# EAGLE board SparkFun_USDA_Watershed_Monitor-Panel (EAGLE 9.6.2), part 1 of 5
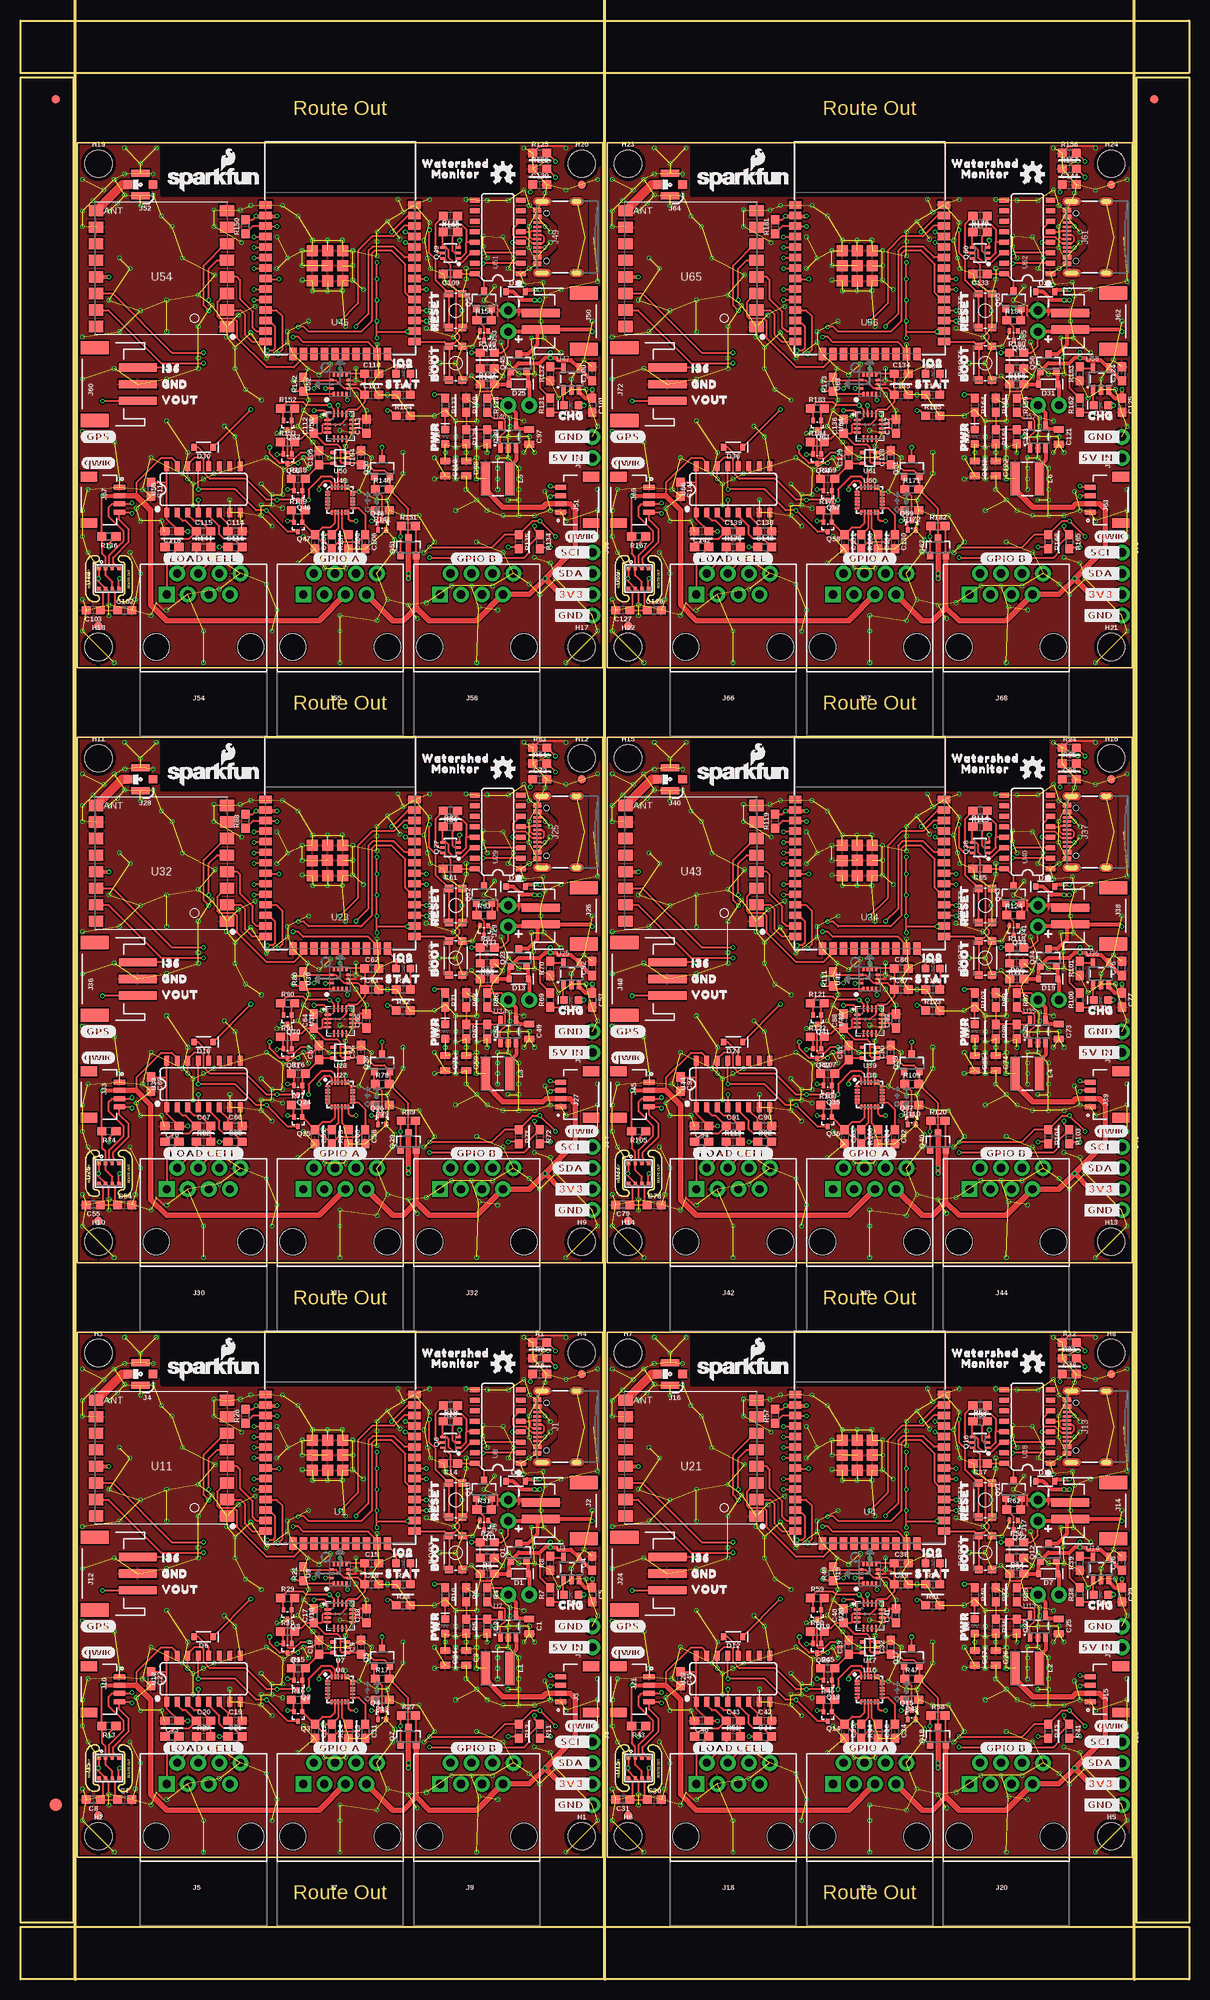
[diagram p0: board, top side]
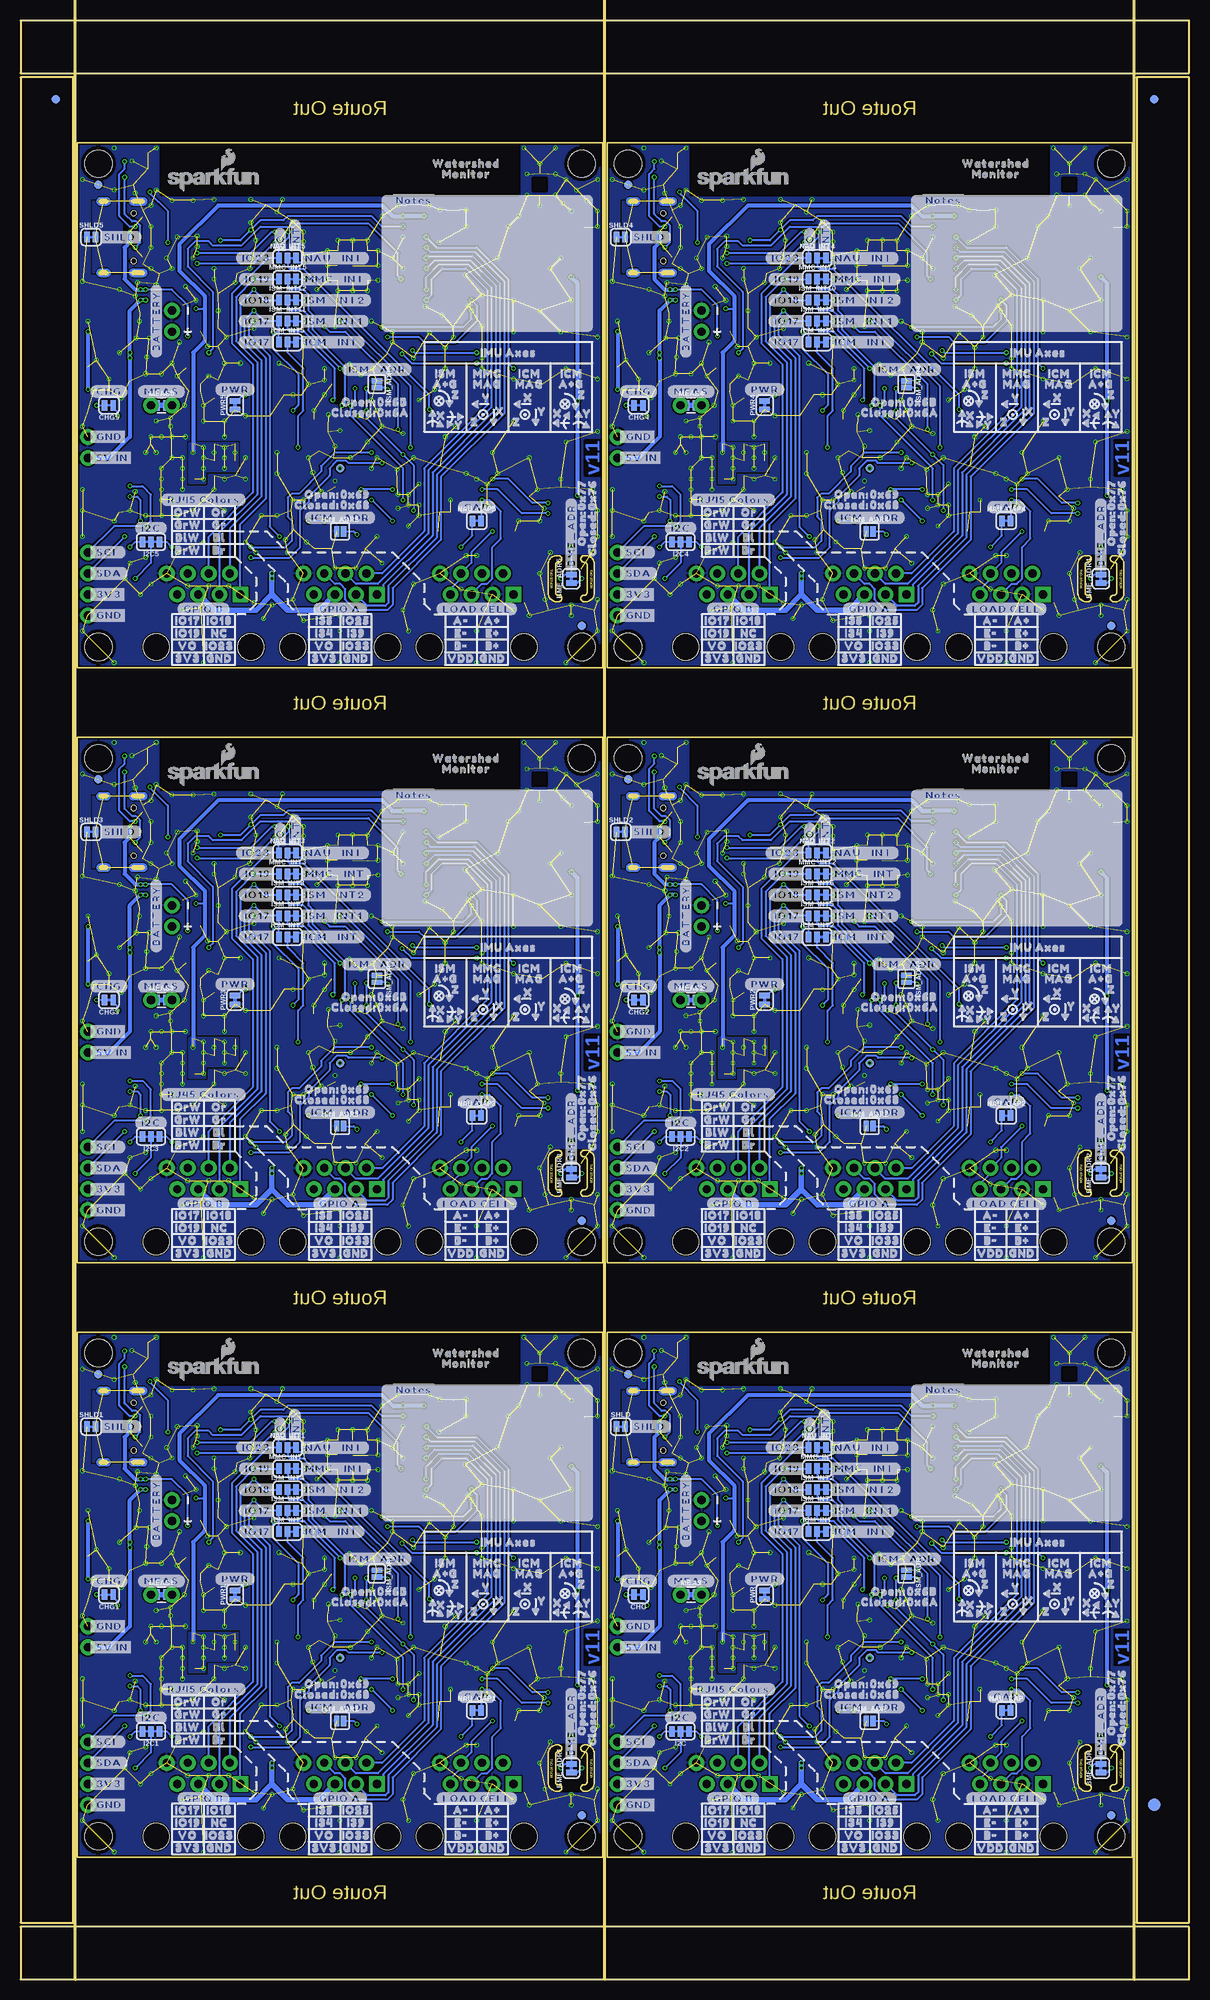
[diagram p1: board, bottom side, seen from below]

Size 141.22 x 236.73 mm. Coordinates in mm from the lower left corner, seen from the top.
Outline: 6.86,14.73 70.36,14.73 70.36,78.23 6.86,78.23 6.86,14.73
Outline: 70.87,14.73 134.37,14.73 134.37,78.23 70.87,78.23 70.87,14.73
Outline: 6.86,86.61 70.36,86.61 70.36,150.11 6.86,150.11 6.86,86.61
Outline: 70.87,86.61 134.37,86.61 134.37,150.11 70.87,150.11 70.87,86.61
Outline: 6.86,158.5 70.36,158.5 70.36,222 6.86,222 6.86,158.5
Outline: 70.87,158.5 134.37,158.5 134.37,222 70.87,222 70.87,158.5
Outline: 0,6.35 141.22,6.35 141.22,0 0,0 0,6.35
Outline: 134.87,229.87 141.22,229.87 141.22,6.86 134.87,6.86 134.87,229.87
Outline: 0,236.73 141.22,236.73 141.22,230.38 0,230.38 0,236.73
Outline: 0,229.87 6.35,229.87 6.35,6.86 0,6.86 0,229.87
Copper layers (1*16): Top 0.035mm / dielectric 1.5mm / Bottom 0.035mm
Design rules "SparkFun_USDA_Watershed_Monitor": minimum track width 5mil, minimum drill 0.3mm, track to track 5mil, track to pad 5mil, pad to pad 5mil, via to via 5mil, smd to smd 5mil, copper to edge 7mil, drill to drill 7mil, minimum pad ring 5mil, minimum via ring 5mil, stop-mask expansion 2.5mil, vias tented up to drill 25mil, thermal gap 10mil
tRestrict: area 17,71.9 to 60.2,78.2; area 18.2,33.9 to 18.4,34; area 19.4,33.9 to 19.7,34; area 20.7,33.8 to 21,33.9; area 22,33.9 to 22.2,34; area 23.2,33.9 to 23.5,34; area 54.9,66.7 to 55.4,66.9; area 54.9,65.4 to 55.4,65.7; area 54.9,64.1 to 55.4,64.4; area 60.5,67.9 to 61,68.2; area 81,71.9 to 124.2,78.2; area 82.2,33.9 to 82.4,34; 48 more areas
bRestrict: area 17,71.9 to 60.2,78.2; area 38.7,46.7 to 39.1,46.9; area 37.2,50.8 to 37.6,50.9; area 81,71.9 to 124.2,78.2; area 102.7,46.7 to 103.1,46.9; area 101.2,50.8 to 101.6,50.9; area 17,143.8 to 60.2,150.1; area 38.7,118.6 to 39.1,118.7; area 37.2,122.7 to 37.6,122.8; area 81,143.8 to 124.2,150.1; area 102.7,118.6 to 103.1,118.7; area 101.2,122.7 to 101.6,122.8; 6 more areas
Milling: 267 lines

## Footprints (pad centres in the part's own frame; a part is rotated, then mirrored left to right if it is on the bottom)
SMT-JUMPER_2_NC_TRACE_SILK = smd 0.66 x 1.27: 1 -0.521,0; 2 0.521,0
TACTILE_SWITCH_SMD_4.6X2.8MM = smd 0.9 x 1: 1 -2.05,-0.8; 2 2.05,-0.8; 3 2.05,0.8; 4 -2.05,0.8
0805 = smd 0.8 x 1.2: 1 -0.9,0; 2 0.9,0
0603 = smd 1.1 x 1: 1 -0.85,0; 2 0.85,0
SOD-323 = smd 0.63 x 0.83: A 1.15,0; C -1.15,0
LED-0603 = smd 1 x 1: A -0.877,0; C 0.877,0
FIDUCIAL-1X2 = smd 1 x 1: 1 0,0
FIDUCIAL-1.5X3 = smd 1.5 x 1.5: 1 0,0
STAND-OFF = hole 3.302: 0,0
SMT-JUMPER_3_2-NC_TRACE_SILK = smd 0.66 x 1.27: 1 -1.041,0; 2 0,0; 3 1.041,0
SMT-JUMPER_2_NO_SILK = smd 0.635 x 1.27: 1 -0.406,0; 2 0.406,0
SMT-JUMPER_3_1-NC_TRACE_SILK = smd 0.66 x 1.27: 1 -1.041,0; 2 0,0; 3 1.041,0
USB-C-16P-2LAYER-PADS = smd 0.3 x 1: A5 -1.25,-0.34; A6 -0.25,-0.34; A7 0.25,-0.34; A8 1.25,-0.34; B5 1.75,-0.34; B6 0.75,-0.34; B7 -0.75,-0.34; B8 -1.75,-0.34 | smd 0.6 x 1: GND -3.225,-0.34; GND2 3.225,-0.34; VBUS1 -2.45,-0.34; VBUS2 2.45,-0.34 | drill 0.4 pad 0.6 long: SHLD1 -4.318,-0.915; SHLD2 4.318,-0.915; SHLD3 -4.318,-5.095; SHLD4 4.318,-5.095 | hole 0.65: -2.89,-1.445; 2.89,-1.445
JST-2-SMD = smd 1 x 4.6: 1 -1,-3.7; 2 1,-3.7 | smd 1.6 x 3.4: NC1 -3.4,1.5; NC2 3.4,1.5
JST04_1MM_RA = smd 0.6 x 1.35: 1 -1.5,0; 2 -0.5,0; 3 0.5,0; 4 1.5,0 | smd 1.2 x 2: NC1 2.8,-3.675; NC2 -2.8,-3.675
U.FL = smd 2.2 x 0.85: 1 0,1.375; 2 0,-1.375 | smd 1.05 x 1: FEED 1.525,0; NC -1.525,0
RJ45-8 = drill 1 pad 1.88 square: 1 -4.445,6.35 | drill 1 pad 1.88: 2 -3.175,8.89; 3 -1.905,6.35; 4 -0.635,8.89; 5 0.635,6.35; 6 1.905,8.89; 7 3.175,6.35; 8 4.445,8.89 | hole 3.2: -5.715,0; 5.715,0
1X02_NO_SILK = drill 1.016 pad 1.88: 1 0,0; 2 2.54,0
1X04_NO_SILK = drill 1.016 pad 1.88: 1 0,0; 2 2.54,0; 3 5.08,0; 4 7.62,0
JST-3-SMD = smd 1 x 4.6: 1 2.01,-4.77; 2 0.01,-4.77; 3 -1.99,-4.77 | smd 1.6 x 3.4: NC1 -4.39,0.43; NC2 4.41,0.43
INDUCTOR_4X4MM = smd 4.089 x 1.143: P$1 0,1.473; P$2 0,-1.473
COMBO-JUMPER_2_NC_TRACE = smd 0.635 x 1.27: 1 -0.508,0; 2 0.508,0 | drill 1.016 pad 1.88: 3 -1.27,0; 4 1.27,0
SOT23-3 = smd 0.8 x 0.9: 1 -0.95,-1; 2 0.95,-1; 3 0,1.1
SOT-416FL = smd 0.46 x 0.65: 1 -0.5,-1.1; 2 0.5,-1.1; 3 0,0.05
SC70-6 = smd 0.3 x 0.66: 1 -0.65,-0.92; 2 0,-0.92; 3 0.65,-0.92; 4 0.65,0.92; 5 0,0.92; 6 -0.65,0.92
PAD.03X.04 = smd 1.016 x 1.016: 1 0,0
ESP-WROOM-32D = smd 0.9 x 1.5: 1 6.43,9; 2 5.16,9; 3 3.89,9; 4 2.62,9; 5 1.35,9; 6 0.08,9; 7 -1.19,9; 8 -2.46,9; 9 -3.73,9; 10 -5,9; 11 -6.27,9; 12 -7.54,9; 13 -8.81,9; 14 -10.08,9; 25 -10.08,-9; 26 -8.81,-9; 27 -7.54,-9; 28 -6.27,-9; 29 -5,-9; 30 -3.73,-9; 31 -2.46,-9; 32 -1.19,-9; 33 0.08,-9; 34 1.35,-9; 35 2.62,-9; 36 3.89,-9; 37 5.16,-9; 38 6.43,-9 | smd 1.5 x 0.9: 15 -11.57,5.715; 16 -11.57,4.445; 17 -11.57,3.175; 18 -11.57,1.905; 19 -11.57,0.635; 20 -11.57,-0.635; 21 -11.57,-1.905; 22 -11.57,-3.175; 23 -11.57,-4.445; 24 -11.57,-5.715 | smd 1.33 x 1.33: GND -0.912,1.531; GNDT1 -2.751,3.346; GNDT2 -2.761,1.516; GNDT3 -2.751,-0.314; GNDT4 -0.891,-0.324; GNDT5 0.909,-0.314; GNDT6 0.909,1.516; GNDT7 0.909,3.346; GNDT8 -0.921,3.346
SOT23-5 = smd 0.55 x 1.2: 1 -0.95,-1.3; 2 0,-1.3; 3 0.95,-1.3; 4 0.95,1.3; 5 -0.95,1.3
LGA3.0X3.0 = smd 0.4 x 0.4: 1 1.2,1.2; 2 1.2,0.4; 3 1.2,-0.4; 4 1.2,-1.2; 5 -1.2,-1.2; 6 -1.2,-0.4; 7 -1.2,0.4; 8 -1.2,1.2
QFN24-3X3-ICM-20948 = smd 0.495 x 0.25: 1 -1.552,1; 6 -1.552,-1; 13 1.552,-1; 18 1.552,1 | smd 0.6 x 0.25: 2 -1.5,0.6; 3 -1.5,0.2; 4 -1.5,-0.2; 5 -1.5,-0.6; 14 1.5,-0.6; 15 1.5,-0.2; 16 1.5,0.2; 17 1.5,0.6 | smd 0.25 x 0.495: 7 -1,-1.552; 12 1,-1.552; 19 1,1.552; 24 -1,1.552 | smd 0.25 x 0.6: 8 -0.6,-1.5; 9 -0.2,-1.5; 10 0.2,-1.5; 11 0.6,-1.5; 20 0.6,1.5; 21 0.2,1.5; 22 -0.2,1.5; 23 -0.6,1.5
SC70 = smd 0.4 x 0.75: 1 -0.65,-0.825; 2 0,-0.825; 3 0.65,-0.825; 4 0.65,0.825; 5 -0.65,0.825
SO016 = smd 0.6 x 1.2: 1 -4.445,-2.8; 2 -3.175,-2.8; 3 -1.905,-2.8; 4 -0.635,-2.8; 5 0.635,-2.8; 6 1.905,-2.8; 7 3.175,-2.8; 8 4.445,-2.8; 9 4.445,2.8; 10 3.175,2.8; 11 1.905,2.8; 12 0.635,2.8; 13 -0.635,2.8; 14 -1.905,2.8; 15 -3.175,2.8; 16 -4.445,2.8
LGA-14L = smd 0.48 x 0.3: P1 -1.163,0.75; P2 -1.163,0.25; P3 -1.163,-0.25; P4 -1.163,-0.75; P8 1.163,-0.75; P9 1.163,-0.25; P10 1.163,0.25; P11 1.163,0.75 | smd 0.3 x 0.48: P5 -0.5,-1; P6 0,-1; P7 0.5,-1; P12 0.5,1; P13 0,1; P14 -0.5,1
LGA-16-3X3MM-4X4PINS = smd 0.3 x 0.85: 1 0.754,1.498; 2 0.254,1.498; 3 -0.246,1.498; 4 -0.746,1.498; 9 -0.746,-1.506; 10 -0.246,-1.506; 11 0.254,-1.506; 12 0.754,-1.506 | smd 0.85 x 0.3: 5 -1.508,0.746; 6 -1.508,0.246; 7 -1.508,-0.254; 8 -1.508,-0.754; 13 1.496,-0.764; 14 1.496,-0.264; 15 1.496,0.236; 16 1.496,0.736
RFM95 = smd 1.75 x 1.35: 3.3V 7.9,1; !RESET -7.9,-3; ANT 7.9,-7; DIO0 7.9,3; DIO1 7.9,5; DIO2 7.9,7; DIO3 7.9,-3; DIO4 7.9,-1; DIO5 -7.9,-5; GND@1 -7.9,7; GND@2 -7.9,-7; GND@3 7.9,-5; NSS -7.9,-1; SCK -7.9,1; SDI -7.9,3; SDO -7.9,5
SO16 = smd 0.6 x 1.2: 1 -4.445,-2.8; 2 -3.175,-2.8; 3 -1.905,-2.8; 4 -0.635,-2.8; 5 0.635,-2.8; 6 1.905,-2.8; 7 3.175,-2.8; 8 4.445,-2.8; 9 4.445,2.8; 10 3.175,2.8; 11 1.905,2.8; 12 0.635,2.8; 13 -0.635,2.8; 14 -1.905,2.8; 15 -3.175,2.8; 16 -4.445,2.8

## Placement (x,y rotation side)
BME_ADR  JUMPER-SMT_2_NC_TRACE_SILK  [SMT-JUMPER_2_NC_TRACE_SILK]  10.67,25.53 90 bottom
BME_ADR1  JUMPER-SMT_2_NC_TRACE_SILK  [SMT-JUMPER_2_NC_TRACE_SILK]  74.68,25.53 90 bottom
BME_ADR2  JUMPER-SMT_2_NC_TRACE_SILK  [SMT-JUMPER_2_NC_TRACE_SILK]  10.67,97.41 90 bottom
BME_ADR3  JUMPER-SMT_2_NC_TRACE_SILK  [SMT-JUMPER_2_NC_TRACE_SILK]  74.68,97.41 90 bottom
BME_ADR4  JUMPER-SMT_2_NC_TRACE_SILK  [SMT-JUMPER_2_NC_TRACE_SILK]  10.67,169.29 90 bottom
BME_ADR5  JUMPER-SMT_2_NC_TRACE_SILK  [SMT-JUMPER_2_NC_TRACE_SILK]  74.68,169.29 90 bottom
BOOT  MOMENTARY-SWITCH-SPST-SMD-4.6X2.8MM  [TACTILE_SWITCH_SMD_4.6X2.8MM]  52.58,51.56 90 top
BOOT1  MOMENTARY-SWITCH-SPST-SMD-4.6X2.8MM  [TACTILE_SWITCH_SMD_4.6X2.8MM]  116.59,51.56 90 top
BOOT2  MOMENTARY-SWITCH-SPST-SMD-4.6X2.8MM  [TACTILE_SWITCH_SMD_4.6X2.8MM]  52.58,123.44 90 top
BOOT3  MOMENTARY-SWITCH-SPST-SMD-4.6X2.8MM  [TACTILE_SWITCH_SMD_4.6X2.8MM]  116.59,123.44 90 top
BOOT4  MOMENTARY-SWITCH-SPST-SMD-4.6X2.8MM  [TACTILE_SWITCH_SMD_4.6X2.8MM]  52.58,195.33 90 top
BOOT5  MOMENTARY-SWITCH-SPST-SMD-4.6X2.8MM  [TACTILE_SWITCH_SMD_4.6X2.8MM]  116.59,195.33 90 top
C1  22uF  [0805]  61.47,42.67 270 top
C2  22pF  [0603]  56.39,42.67 270 top
C3  22uF  [0805]  53.85,38.86 270 top
C4  4.7uF  [0603]  69.09,50.29 90 top
C5  4.7uF  [0603]  69.09,46.48 270 top
C6  10nF  [0603]  62.74,73.15 0 top
C7  0.1uF  [0603]  12.57,21.72 0 top
C8  0.1uF  [0603]  8.76,21.72 180 top
C9  1.0uF  [0603]  41.15,40.13 90 top
C10  1.0uF  [0603]  36.07,40.13 90 top
C11  0.1uF  [0603]  41.66,29.97 270 top
C12  0.1uF  [0603]  35.56,29.97 270 top
C13  0.1uF  [0603]  39.62,29.97 270 top
C14  0.1uF  [0603]  51.94,62.36 180 top
C15  DNP  [0603]  42.42,50.29 0 top
C16  DNP  [0603]  42.42,47.75 0 top
C17  DNP  [0603]  35.43,43.94 90 top
C18  DNP  [0603]  41.78,43.94 90 top
C19  0.1uF  [0603]  25.91,31.24 0 top
C20  0.1uF  [0603]  22.1,31.24 0 top
C21  330pF  [0603]  25.91,29.34 0 top
C22  0.1uF  [0603]  15.75,36.32 270 top
C23  10uF  [0603]  18.29,31.24 180 top
C24  22uF  [0805]  51.31,38.86 270 top
C25  22uF  [0805]  125.48,42.67 270 top
C26  22uF  [0805]  117.86,38.86 270 top
C27  22pF  [0603]  120.4,42.67 270 top
C28  4.7uF  [0603]  133.1,50.29 90 top
C29  4.7uF  [0603]  133.1,46.48 270 top
C30  0.1uF  [0603]  76.58,21.72 0 top
C31  0.1uF  [0603]  72.77,21.72 180 top
C32  1.0uF  [0603]  105.16,40.13 90 top
C33  1.0uF  [0603]  100.08,40.13 90 top
C34  0.1uF  [0603]  105.66,29.97 270 top
C35  0.1uF  [0603]  99.57,29.97 270 top
C36  0.1uF  [0603]  103.63,29.97 270 top
C37  0.1uF  [0603]  115.95,62.36 180 top
C38  DNP  [0603]  106.43,50.29 0 top
C39  DNP  [0603]  106.43,47.75 0 top
C40  DNP  [0603]  99.44,43.94 90 top
C41  DNP  [0603]  105.79,43.94 90 top
C42  0.1uF  [0603]  89.92,31.24 0 top
C43  0.1uF  [0603]  86.11,31.24 0 top
C44  330pF  [0603]  89.92,29.34 0 top
C45  0.1uF  [0603]  79.76,36.32 270 top
C46  10uF  [0603]  82.3,31.24 180 top
C47  22uF  [0805]  115.32,38.86 270 top
C48  10nF  [0603]  126.75,73.15 0 top
C49  22uF  [0805]  61.47,114.55 270 top
C50  22uF  [0805]  53.85,110.74 270 top
C51  22pF  [0603]  56.39,114.55 270 top
C52  4.7uF  [0603]  69.09,122.17 90 top
C53  4.7uF  [0603]  69.09,118.36 270 top
C54  0.1uF  [0603]  12.57,93.6 0 top
C55  0.1uF  [0603]  8.76,93.6 180 top
C56  1.0uF  [0603]  41.15,112.01 90 top
C57  1.0uF  [0603]  36.07,112.01 90 top
C58  0.1uF  [0603]  41.66,101.85 270 top
C59  0.1uF  [0603]  35.56,101.85 270 top
C60  0.1uF  [0603]  39.62,101.85 270 top
C61  0.1uF  [0603]  51.94,134.24 180 top
C62  DNP  [0603]  42.42,122.17 0 top
C63  DNP  [0603]  42.42,119.63 0 top
C64  DNP  [0603]  35.43,115.82 90 top
C65  DNP  [0603]  41.78,115.82 90 top
C66  0.1uF  [0603]  25.91,103.12 0 top
C67  0.1uF  [0603]  22.1,103.12 0 top
C68  330pF  [0603]  25.91,101.22 0 top
C69  0.1uF  [0603]  15.75,108.2 270 top
C70  10uF  [0603]  18.29,103.12 180 top
C71  22uF  [0805]  51.31,110.74 270 top
C72  10nF  [0603]  62.74,145.03 0 top
C73  22uF  [0805]  125.48,114.55 270 top
C74  22uF  [0805]  117.86,110.74 270 top
C75  22pF  [0603]  120.4,114.55 270 top
C76  4.7uF  [0603]  133.1,122.17 90 top
C77  4.7uF  [0603]  133.1,118.36 270 top
C78  0.1uF  [0603]  76.58,93.6 0 top
C79  0.1uF  [0603]  72.77,93.6 180 top
C80  1.0uF  [0603]  105.16,112.01 90 top
C81  1.0uF  [0603]  100.08,112.01 90 top
C82  0.1uF  [0603]  105.66,101.85 270 top
C83  0.1uF  [0603]  99.57,101.85 270 top
C84  0.1uF  [0603]  103.63,101.85 270 top
C85  0.1uF  [0603]  115.95,134.24 180 top
C86  DNP  [0603]  106.43,122.17 0 top
C87  DNP  [0603]  106.43,119.63 0 top
C88  DNP  [0603]  99.44,115.82 90 top
C89  DNP  [0603]  105.79,115.82 90 top
C90  0.1uF  [0603]  89.92,103.12 0 top
C91  0.1uF  [0603]  86.11,103.12 0 top
C92  330pF  [0603]  89.92,101.22 0 top
C93  0.1uF  [0603]  79.76,108.2 270 top
C94  10uF  [0603]  82.3,103.12 180 top
C95  22uF  [0805]  115.32,110.74 270 top
C96  10nF  [0603]  126.75,145.03 0 top
C97  22uF  [0805]  61.47,186.44 270 top
C98  22uF  [0805]  53.85,182.63 270 top
C99  22pF  [0603]  56.39,186.44 270 top
C100  4.7uF  [0603]  69.09,194.06 90 top
C101  4.7uF  [0603]  69.09,190.25 270 top
C102  0.1uF  [0603]  12.57,165.48 0 top
C103  0.1uF  [0603]  8.76,165.48 180 top
C104  1.0uF  [0603]  41.15,183.9 90 top
C105  1.0uF  [0603]  36.07,183.9 90 top
C106  0.1uF  [0603]  41.66,173.74 270 top
C107  0.1uF  [0603]  35.56,173.74 270 top
C108  0.1uF  [0603]  39.62,173.74 270 top
C109  0.1uF  [0603]  51.94,206.12 180 top
C110  DNP  [0603]  42.42,194.06 0 top
C111  DNP  [0603]  42.42,191.52 0 top
C112  DNP  [0603]  35.43,187.71 90 top
C113  DNP  [0603]  41.78,187.71 90 top
C114  0.1uF  [0603]  25.91,175.01 0 top
C115  0.1uF  [0603]  22.1,175.01 0 top
C116  330pF  [0603]  25.91,173.1 0 top
C117  0.1uF  [0603]  15.75,180.09 270 top
C118  10uF  [0603]  18.29,175.01 180 top
C119  22uF  [0805]  51.31,182.63 270 top
C120  10nF  [0603]  62.74,216.92 0 top
C121  22uF  [0805]  125.48,186.44 270 top
C122  22uF  [0805]  117.86,182.63 270 top
C123  22pF  [0603]  120.4,186.44 270 top
C124  4.7uF  [0603]  133.1,194.06 90 top
C125  4.7uF  [0603]  133.1,190.25 270 top
C126  0.1uF  [0603]  76.58,165.48 0 top
C127  0.1uF  [0603]  72.77,165.48 180 top
C128  1.0uF  [0603]  105.16,183.9 90 top
C129  1.0uF  [0603]  100.08,183.9 90 top
C130  0.1uF  [0603]  105.66,173.74 270 top
C131  0.1uF  [0603]  99.57,173.74 270 top
C132  0.1uF  [0603]  103.63,173.74 270 top
C133  0.1uF  [0603]  115.95,206.12 180 top
C134  DNP  [0603]  106.43,194.06 0 top
C135  DNP  [0603]  106.43,191.52 0 top
C136  DNP  [0603]  99.44,187.71 90 top
C137  DNP  [0603]  105.79,187.71 90 top
C138  0.1uF  [0603]  89.92,175.01 0 top
C139  0.1uF  [0603]  86.11,175.01 0 top
C140  330pF  [0603]  89.92,173.1 0 top
C141  0.1uF  [0603]  79.76,180.09 270 top
C142  10uF  [0603]  82.3,175.01 180 top
C143  22uF  [0805]  115.32,182.63 270 top
C144  10nF  [0603]  126.75,216.92 0 top
CHG  JUMPER-SMT_2_NC_TRACE_SILK  [SMT-JUMPER_2_NC_TRACE_SILK]  66.55,46.48 180 bottom
CHG1  JUMPER-SMT_2_NC_TRACE_SILK  [SMT-JUMPER_2_NC_TRACE_SILK]  130.56,46.48 180 bottom
CHG2  JUMPER-SMT_2_NC_TRACE_SILK  [SMT-JUMPER_2_NC_TRACE_SILK]  66.55,118.36 180 bottom
CHG3  JUMPER-SMT_2_NC_TRACE_SILK  [SMT-JUMPER_2_NC_TRACE_SILK]  130.56,118.36 180 bottom
CHG4  JUMPER-SMT_2_NC_TRACE_SILK  [SMT-JUMPER_2_NC_TRACE_SILK]  66.55,190.25 180 bottom
CHG5  JUMPER-SMT_2_NC_TRACE_SILK  [SMT-JUMPER_2_NC_TRACE_SILK]  130.56,190.25 180 bottom
D1  1A/23V/620mV  [SOD-323]  60.2,49.02 180 top
D2  DNP  [LED-0603]  51.31,42.67 90 top
D3  Yellow  [LED-0603]  66.55,46.48 180 top
D4  BLUE  [LED-0603]  46.23,50.29 0 top
D5  1A/23V/620mV  [SOD-323]  59.82,60.2 0 top
D6  1A/23V/620mV  [SOD-323]  22.1,41.4 180 top
D7  1A/23V/620mV  [SOD-323]  124.21,49.02 180 top
D8  DNP  [LED-0603]  115.32,42.67 90 top
D9  Yellow  [LED-0603]  130.56,46.48 180 top
D10  BLUE  [LED-0603]  110.24,50.29 0 top
D11  1A/23V/620mV  [SOD-323]  123.83,60.2 0 top
D12  1A/23V/620mV  [SOD-323]  86.11,41.4 180 top
D13  1A/23V/620mV  [SOD-323]  60.2,120.9 180 top
D14  DNP  [LED-0603]  51.31,114.55 90 top
D15  Yellow  [LED-0603]  66.55,118.36 180 top
D16  BLUE  [LED-0603]  46.23,122.17 0 top
D17  1A/23V/620mV  [SOD-323]  59.82,132.08 0 top
D18  1A/23V/620mV  [SOD-323]  22.1,113.28 180 top
D19  1A/23V/620mV  [SOD-323]  124.21,120.9 180 top
D20  DNP  [LED-0603]  115.32,114.55 90 top
D21  Yellow  [LED-0603]  130.56,118.36 180 top
D22  BLUE  [LED-0603]  110.24,122.17 0 top
D23  1A/23V/620mV  [SOD-323]  123.83,132.08 0 top
D24  1A/23V/620mV  [SOD-323]  86.11,113.28 180 top
D25  1A/23V/620mV  [SOD-323]  60.2,192.79 180 top
D26  DNP  [LED-0603]  51.31,186.44 90 top
D27  Yellow  [LED-0603]  66.55,190.25 180 top
D28  BLUE  [LED-0603]  46.23,194.06 0 top
D29  1A/23V/620mV  [SOD-323]  59.82,203.96 0 top
D30  1A/23V/620mV  [SOD-323]  22.1,185.17 180 top
D31  1A/23V/620mV  [SOD-323]  124.21,192.79 180 top
D32  DNP  [LED-0603]  115.32,186.44 90 top
D33  Yellow  [LED-0603]  130.56,190.25 180 top
D34  BLUE  [LED-0603]  110.24,194.06 0 top
D35  1A/23V/620mV  [SOD-323]  123.83,203.96 0 top
D36  1A/23V/620mV  [SOD-323]  86.11,185.17 180 top
E$1  [FIDUCIAL-1X2]  4.23,227.2 0 top
E$2  [FIDUCIAL-1X2]  4.23,227.2 0 bottom
E$3  [FIDUCIAL-1X2]  136.99,227.2 0 top
E$4  [FIDUCIAL-1X2]  136.99,227.2 0 bottom
E$5  [FIDUCIAL-1.5X3]  4.23,21.08 0 top
E$6  [FIDUCIAL-1.5X3]  4.23,21.08 0 bottom
FD1  FIDUCIAL1X2  [FIDUCIAL-1X2]  9.4,19.81 0 bottom
FD2  FIDUCIAL1X2  [FIDUCIAL-1X2]  9.4,19.81 0 top
FD3  FIDUCIAL1X2  [FIDUCIAL-1X2]  67.82,73.15 0 top
FD4  FIDUCIAL1X2  [FIDUCIAL-1X2]  67.82,73.15 0 bottom
FD5  FIDUCIAL1X2  [FIDUCIAL-1X2]  73.41,19.81 0 bottom
FD6  FIDUCIAL1X2  [FIDUCIAL-1X2]  73.41,19.81 0 top
FD7  FIDUCIAL1X2  [FIDUCIAL-1X2]  131.83,73.15 0 top
FD8  FIDUCIAL1X2  [FIDUCIAL-1X2]  131.83,73.15 0 bottom
FD9  FIDUCIAL1X2  [FIDUCIAL-1X2]  9.4,91.69 0 bottom
FD10  FIDUCIAL1X2  [FIDUCIAL-1X2]  9.4,91.69 0 top
FD11  FIDUCIAL1X2  [FIDUCIAL-1X2]  67.82,145.03 0 top
FD12  FIDUCIAL1X2  [FIDUCIAL-1X2]  67.82,145.03 0 bottom
FD13  FIDUCIAL1X2  [FIDUCIAL-1X2]  73.41,91.69 0 bottom
FD14  FIDUCIAL1X2  [FIDUCIAL-1X2]  73.41,91.69 0 top
FD15  FIDUCIAL1X2  [FIDUCIAL-1X2]  131.83,145.03 0 top
FD16  FIDUCIAL1X2  [FIDUCIAL-1X2]  131.83,145.03 0 bottom
FD17  FIDUCIAL1X2  [FIDUCIAL-1X2]  9.4,163.58 0 bottom
FD18  FIDUCIAL1X2  [FIDUCIAL-1X2]  9.4,163.58 0 top
FD19  FIDUCIAL1X2  [FIDUCIAL-1X2]  67.82,216.92 0 top
FD20  FIDUCIAL1X2  [FIDUCIAL-1X2]  67.82,216.92 0 bottom
FD21  FIDUCIAL1X2  [FIDUCIAL-1X2]  73.41,163.58 0 bottom
FD22  FIDUCIAL1X2  [FIDUCIAL-1X2]  73.41,163.58 0 top
FD23  FIDUCIAL1X2  [FIDUCIAL-1X2]  131.83,216.92 0 top
FD24  FIDUCIAL1X2  [FIDUCIAL-1X2]  131.83,216.92 0 bottom
H1  STAND-OFF  [STAND-OFF]  67.82,17.27 0 top
H2  STAND-OFF  [STAND-OFF]  9.4,17.27 0 top
H3  STAND-OFF  [STAND-OFF]  9.4,75.69 0 top
H4  STAND-OFF  [STAND-OFF]  67.82,75.69 0 top
H5  STAND-OFF  [STAND-OFF]  131.83,17.27 0 top
H6  STAND-OFF  [STAND-OFF]  73.41,17.27 0 top
H7  STAND-OFF  [STAND-OFF]  73.41,75.69 0 top
H8  STAND-OFF  [STAND-OFF]  131.83,75.69 0 top
H9  STAND-OFF  [STAND-OFF]  67.82,89.15 0 top
H10  STAND-OFF  [STAND-OFF]  9.4,89.15 0 top
H11  STAND-OFF  [STAND-OFF]  9.4,147.57 0 top
H12  STAND-OFF  [STAND-OFF]  67.82,147.57 0 top
H13  STAND-OFF  [STAND-OFF]  131.83,89.15 0 top
H14  STAND-OFF  [STAND-OFF]  73.41,89.15 0 top
H15  STAND-OFF  [STAND-OFF]  73.41,147.57 0 top
H16  STAND-OFF  [STAND-OFF]  131.83,147.57 0 top
H17  STAND-OFF  [STAND-OFF]  67.82,161.04 0 top
H18  STAND-OFF  [STAND-OFF]  9.4,161.04 0 top
H19  STAND-OFF  [STAND-OFF]  9.4,219.46 0 top
H20  STAND-OFF  [STAND-OFF]  67.82,219.46 0 top
H21  STAND-OFF  [STAND-OFF]  131.83,161.04 0 top
H22  STAND-OFF  [STAND-OFF]  73.41,161.04 0 top
H23  STAND-OFF  [STAND-OFF]  73.41,219.46 0 top
H24  STAND-OFF  [STAND-OFF]  131.83,219.46 0 top
I2C  JUMPER-SMT_3_2-NC_TRACE_SILK  [SMT-JUMPER_3_2-NC_TRACE_SILK]  61.47,29.97 180 bottom
I2C1  JUMPER-SMT_3_2-NC_TRACE_SILK  [SMT-JUMPER_3_2-NC_TRACE_SILK]  125.48,29.97 180 bottom
I2C2  JUMPER-SMT_3_2-NC_TRACE_SILK  [SMT-JUMPER_3_2-NC_TRACE_SILK]  61.47,101.85 180 bottom
I2C3  JUMPER-SMT_3_2-NC_TRACE_SILK  [SMT-JUMPER_3_2-NC_TRACE_SILK]  125.48,101.85 180 bottom
I2C4  JUMPER-SMT_3_2-NC_TRACE_SILK  [SMT-JUMPER_3_2-NC_TRACE_SILK]  61.47,173.74 180 bottom
I2C5  JUMPER-SMT_3_2-NC_TRACE_SILK  [SMT-JUMPER_3_2-NC_TRACE_SILK]  125.48,173.74 180 bottom
ICM_ADR  JUMPER-SMT_2_NO_SILK  [SMT-JUMPER_2_NO_SILK]  38.61,31.24 0 bottom
ICM_ADR1  JUMPER-SMT_2_NO_SILK  [SMT-JUMPER_2_NO_SILK]  102.62,31.24 0 bottom
ICM_ADR2  JUMPER-SMT_2_NO_SILK  [SMT-JUMPER_2_NO_SILK]  38.61,103.12 0 bottom
ICM_ADR3  JUMPER-SMT_2_NO_SILK  [SMT-JUMPER_2_NO_SILK]  102.62,103.12 0 bottom
ICM_ADR4  JUMPER-SMT_2_NO_SILK  [SMT-JUMPER_2_NO_SILK]  38.61,175.01 0 bottom
ICM_ADR5  JUMPER-SMT_2_NO_SILK  [SMT-JUMPER_2_NO_SILK]  102.62,175.01 0 bottom
ICM_INT  JUMPER-SMT_3_1-NC_TRACE_SILK  [SMT-JUMPER_3_1-NC_TRACE_SILK]  44.96,54.1 0 bottom
ICM_INT1  JUMPER-SMT_3_1-NC_TRACE_SILK  [SMT-JUMPER_3_1-NC_TRACE_SILK]  108.97,54.1 0 bottom
ICM_INT2  JUMPER-SMT_3_1-NC_TRACE_SILK  [SMT-JUMPER_3_1-NC_TRACE_SILK]  44.96,125.98 0 bottom
ICM_INT3  JUMPER-SMT_3_1-NC_TRACE_SILK  [SMT-JUMPER_3_1-NC_TRACE_SILK]  108.97,125.98 0 bottom
ICM_INT4  JUMPER-SMT_3_1-NC_TRACE_SILK  [SMT-JUMPER_3_1-NC_TRACE_SILK]  44.96,197.87 0 bottom
ICM_INT5  JUMPER-SMT_3_1-NC_TRACE_SILK  [SMT-JUMPER_3_1-NC_TRACE_SILK]  108.97,197.87 0 bottom
ISM_ADR  JUMPER-SMT_2_NO_SILK  [SMT-JUMPER_2_NO_SILK]  34.16,49.02 270 bottom
ISM_ADR1  JUMPER-SMT_2_NO_SILK  [SMT-JUMPER_2_NO_SILK]  98.17,49.02 270 bottom
ISM_ADR2  JUMPER-SMT_2_NO_SILK  [SMT-JUMPER_2_NO_SILK]  34.16,120.9 270 bottom
ISM_ADR3  JUMPER-SMT_2_NO_SILK  [SMT-JUMPER_2_NO_SILK]  98.17,120.9 270 bottom
ISM_ADR4  JUMPER-SMT_2_NO_SILK  [SMT-JUMPER_2_NO_SILK]  34.16,192.79 270 bottom
ISM_ADR5  JUMPER-SMT_2_NO_SILK  [SMT-JUMPER_2_NO_SILK]  98.17,192.79 270 bottom
ISM_INT1  JUMPER-SMT_3_1-NC_TRACE_SILK  [SMT-JUMPER_3_1-NC_TRACE_SILK]  44.96,56.64 0 bottom
ISM_INT2  JUMPER-SMT_3_1-NC_TRACE_SILK  [SMT-JUMPER_3_1-NC_TRACE_SILK]  44.96,59.18 0 bottom
ISM_INT3  JUMPER-SMT_3_1-NC_TRACE_SILK  [SMT-JUMPER_3_1-NC_TRACE_SILK]  108.97,56.64 0 bottom
ISM_INT4  JUMPER-SMT_3_1-NC_TRACE_SILK  [SMT-JUMPER_3_1-NC_TRACE_SILK]  108.97,59.18 0 bottom
ISM_INT5  JUMPER-SMT_3_1-NC_TRACE_SILK  [SMT-JUMPER_3_1-NC_TRACE_SILK]  44.96,128.52 0 bottom
ISM_INT6  JUMPER-SMT_3_1-NC_TRACE_SILK  [SMT-JUMPER_3_1-NC_TRACE_SILK]  44.96,131.06 0 bottom
ISM_INT7  JUMPER-SMT_3_1-NC_TRACE_SILK  [SMT-JUMPER_3_1-NC_TRACE_SILK]  108.97,128.52 0 bottom
ISM_INT8  JUMPER-SMT_3_1-NC_TRACE_SILK  [SMT-JUMPER_3_1-NC_TRACE_SILK]  108.97,131.06 0 bottom
ISM_INT9  JUMPER-SMT_3_1-NC_TRACE_SILK  [SMT-JUMPER_3_1-NC_TRACE_SILK]  44.96,200.41 0 bottom
ISM_INT10  JUMPER-SMT_3_1-NC_TRACE_SILK  [SMT-JUMPER_3_1-NC_TRACE_SILK]  44.96,202.95 0 bottom
ISM_INT11  JUMPER-SMT_3_1-NC_TRACE_SILK  [SMT-JUMPER_3_1-NC_TRACE_SILK]  108.97,200.41 0 bottom
ISM_INT12  JUMPER-SMT_3_1-NC_TRACE_SILK  [SMT-JUMPER_3_1-NC_TRACE_SILK]  108.97,202.95 0 bottom
J1  [USB-C-16P-2LAYER-PADS]  62.1,66.8 90 top
J2  [JST-2-SMD]  66.55,56.64 270 top
J3  QWIIC_RIGHT_ANGLE  [JST04_1MM_RA]  65.28,35.05 90 top
J4  U.FL  [U.FL]  14.48,73.15 180 top
J5  RJ45  [RJ45-8]  22.1,17.27 0 top
J6  [1X02_NO_SILK]  58.93,55.37 90 top
J7  RJ45  [RJ45-8]  38.61,17.27 0 top
J8  [1X04_NO_SILK]  69.09,28.7 270 top
J9  RJ45  [RJ45-8]  55.12,17.27 0 top
J10  QWIIC_RIGHT_ANGLE  [JST04_1MM_RA]  11.94,35.05 270 top
J11  [1X02_NO_SILK]  69.09,40.13 90 top
J12  3-PIN SMD  [JST-3-SMD]  9.4,49.02 90 top
J13  [USB-C-16P-2LAYER-PADS]  126.11,66.8 90 top
J14  [JST-2-SMD]  130.56,56.64 270 top
J15  QWIIC_RIGHT_ANGLE  [JST04_1MM_RA]  129.29,35.05 90 top
J16  U.FL  [U.FL]  78.49,73.15 180 top
J17  [1X02_NO_SILK]  122.94,55.37 90 top
J18  RJ45  [RJ45-8]  86.11,17.27 0 top
J19  RJ45  [RJ45-8]  102.62,17.27 0 top
J20  RJ45  [RJ45-8]  119.13,17.27 0 top
J21  QWIIC_RIGHT_ANGLE  [JST04_1MM_RA]  75.95,35.05 270 top
J22  [1X04_NO_SILK]  133.1,28.7 270 top
J23  [1X02_NO_SILK]  133.1,40.13 90 top
J24  3-PIN SMD  [JST-3-SMD]  73.41,49.02 90 top
J25  [USB-C-16P-2LAYER-PADS]  62.1,138.68 90 top
J26  [JST-2-SMD]  66.55,128.52 270 top
J27  QWIIC_RIGHT_ANGLE  [JST04_1MM_RA]  65.28,106.93 90 top
J28  U.FL  [U.FL]  14.48,145.03 180 top
J29  [1X02_NO_SILK]  58.93,127.25 90 top
J30  RJ45  [RJ45-8]  22.1,89.15 0 top
J31  RJ45  [RJ45-8]  38.61,89.15 0 top
J32  RJ45  [RJ45-8]  55.12,89.15 0 top
J33  QWIIC_RIGHT_ANGLE  [JST04_1MM_RA]  11.94,106.93 270 top
J34  [1X04_NO_SILK]  69.09,100.58 270 top
J35  [1X02_NO_SILK]  69.09,112.01 90 top
J36  3-PIN SMD  [JST-3-SMD]  9.4,120.9 90 top
J37  [USB-C-16P-2LAYER-PADS]  126.11,138.68 90 top
J38  [JST-2-SMD]  130.56,128.52 270 top
J39  QWIIC_RIGHT_ANGLE  [JST04_1MM_RA]  129.29,106.93 90 top
J40  U.FL  [U.FL]  78.49,145.03 180 top
J41  [1X02_NO_SILK]  122.94,127.25 90 top
J42  RJ45  [RJ45-8]  86.11,89.15 0 top
J43  RJ45  [RJ45-8]  102.62,89.15 0 top
J44  RJ45  [RJ45-8]  119.13,89.15 0 top
J45  QWIIC_RIGHT_ANGLE  [JST04_1MM_RA]  75.95,106.93 270 top
J46  [1X04_NO_SILK]  133.1,100.58 270 top
J47  [1X02_NO_SILK]  133.1,112.01 90 top
J48  3-PIN SMD  [JST-3-SMD]  73.41,120.9 90 top
J49  [USB-C-16P-2LAYER-PADS]  62.1,210.57 90 top
J50  [JST-2-SMD]  66.55,200.41 270 top
J51  QWIIC_RIGHT_ANGLE  [JST04_1MM_RA]  65.28,178.82 90 top
J52  U.FL  [U.FL]  14.48,216.92 180 top
J53  [1X02_NO_SILK]  58.93,199.14 90 top
J54  RJ45  [RJ45-8]  22.1,161.04 0 top
J55  RJ45  [RJ45-8]  38.61,161.04 0 top
J56  RJ45  [RJ45-8]  55.12,161.04 0 top
J57  QWIIC_RIGHT_ANGLE  [JST04_1MM_RA]  11.94,178.82 270 top
J58  [1X04_NO_SILK]  69.09,172.47 270 top
J59  [1X02_NO_SILK]  69.09,183.9 90 top
J60  3-PIN SMD  [JST-3-SMD]  9.4,192.79 90 top
J61  [USB-C-16P-2LAYER-PADS]  126.11,210.57 90 top
J62  [JST-2-SMD]  130.56,200.41 270 top
J63  QWIIC_RIGHT_ANGLE  [JST04_1MM_RA]  129.29,178.82 90 top
J64  U.FL  [U.FL]  78.49,216.92 180 top
J65  [1X02_NO_SILK]  122.94,199.14 90 top
J66  RJ45  [RJ45-8]  86.11,161.04 0 top
J67  RJ45  [RJ45-8]  102.62,161.04 0 top
J68  RJ45  [RJ45-8]  119.13,161.04 0 top
J69  QWIIC_RIGHT_ANGLE  [JST04_1MM_RA]  75.95,178.82 270 top
J70  [1X04_NO_SILK]  133.1,172.47 270 top
J71  [1X02_NO_SILK]  133.1,183.9 90 top
J72  3-PIN SMD  [JST-3-SMD]  73.41,192.79 90 top
L1  2.2μH  [INDUCTOR_4X4MM]  57.66,37.59 270 top
L2  2.2μH  [INDUCTOR_4X4MM]  121.67,37.59 270 top
L3  2.2μH  [INDUCTOR_4X4MM]  57.66,109.47 270 top
L4  2.2μH  [INDUCTOR_4X4MM]  121.67,109.47 270 top
L5  2.2μH  [INDUCTOR_4X4MM]  57.66,181.36 270 top
L6  2.2μH  [INDUCTOR_4X4MM]  121.67,181.36 270 top
LOGO1  SFE_LOGO_NAME_FLAME.1_INCH  [SFE_LOGO_NAME_FLAME_.1]  23.37,73.79 0 top
LOGO2  OSHW-LOGOS  [OSHW-LOGO-S]  58.29,74.42 0 top
LOGO3  QWIIC_LOGO_4MM  [QWIIC_4MM]  67.82,30.61 0 top
LOGO4  QWIIC_LOGO_4MM  [QWIIC_4MM]  9.4,39.5 0 top
LOGO5  SFE_LOGO_NAME_FLAME.1_INCH  [SFE_LOGO_NAME_FLAME_.1]  53.85,73.79 0 bottom
LOGO6  SFE_LOGO_NAME_FLAME.1_INCH  [SFE_LOGO_NAME_FLAME_.1]  87.38,73.79 0 top
LOGO7  OSHW-LOGOS  [OSHW-LOGO-S]  122.3,74.42 0 top
LOGO8  QWIIC_LOGO_4MM  [QWIIC_4MM]  131.83,30.61 0 top
LOGO9  QWIIC_LOGO_4MM  [QWIIC_4MM]  73.41,39.5 0 top
LOGO10  SFE_LOGO_NAME_FLAME.1_INCH  [SFE_LOGO_NAME_FLAME_.1]  117.86,73.79 0 bottom
LOGO11  SFE_LOGO_NAME_FLAME.1_INCH  [SFE_LOGO_NAME_FLAME_.1]  23.37,145.67 0 top
LOGO12  OSHW-LOGOS  [OSHW-LOGO-S]  58.29,146.3 0 top
LOGO13  QWIIC_LOGO_4MM  [QWIIC_4MM]  67.82,102.49 0 top
LOGO14  QWIIC_LOGO_4MM  [QWIIC_4MM]  9.4,111.38 0 top
LOGO15  SFE_LOGO_NAME_FLAME.1_INCH  [SFE_LOGO_NAME_FLAME_.1]  53.85,145.67 0 bottom
LOGO16  SFE_LOGO_NAME_FLAME.1_INCH  [SFE_LOGO_NAME_FLAME_.1]  87.38,145.67 0 top
LOGO17  OSHW-LOGOS  [OSHW-LOGO-S]  122.3,146.3 0 top
LOGO18  QWIIC_LOGO_4MM  [QWIIC_4MM]  131.83,102.49 0 top
LOGO19  QWIIC_LOGO_4MM  [QWIIC_4MM]  73.41,111.38 0 top
LOGO20  SFE_LOGO_NAME_FLAME.1_INCH  [SFE_LOGO_NAME_FLAME_.1]  117.86,145.67 0 bottom
LOGO21  SFE_LOGO_NAME_FLAME.1_INCH  [SFE_LOGO_NAME_FLAME_.1]  23.37,217.55 0 top
LOGO22  OSHW-LOGOS  [OSHW-LOGO-S]  58.29,218.19 0 top
LOGO23  QWIIC_LOGO_4MM  [QWIIC_4MM]  67.82,174.37 0 top
LOGO24  QWIIC_LOGO_4MM  [QWIIC_4MM]  9.4,183.26 0 top
LOGO25  SFE_LOGO_NAME_FLAME.1_INCH  [SFE_LOGO_NAME_FLAME_.1]  53.85,217.55 0 bottom
LOGO26  SFE_LOGO_NAME_FLAME.1_INCH  [SFE_LOGO_NAME_FLAME_.1]  87.38,217.55 0 top
LOGO27  OSHW-LOGOS  [OSHW-LOGO-S]  122.3,218.19 0 top
LOGO28  QWIIC_LOGO_4MM  [QWIIC_4MM]  131.83,174.37 0 top
LOGO29  QWIIC_LOGO_4MM  [QWIIC_4MM]  73.41,183.26 0 top
LOGO30  SFE_LOGO_NAME_FLAME.1_INCH  [SFE_LOGO_NAME_FLAME_.1]  117.86,217.55 0 bottom
MEAS  JUMPER-COMBO_2_NC_TRACE  [COMBO-JUMPER_2_NC_TRACE]  60.2,46.48 0 bottom
MEAS1  JUMPER-COMBO_2_NC_TRACE  [COMBO-JUMPER_2_NC_TRACE]  124.21,46.48 0 bottom
MEAS2  JUMPER-COMBO_2_NC_TRACE  [COMBO-JUMPER_2_NC_TRACE]  60.2,118.36 0 bottom
MEAS3  JUMPER-COMBO_2_NC_TRACE  [COMBO-JUMPER_2_NC_TRACE]  124.21,118.36 0 bottom
MEAS4  JUMPER-COMBO_2_NC_TRACE  [COMBO-JUMPER_2_NC_TRACE]  60.2,190.25 0 bottom
MEAS5  JUMPER-COMBO_2_NC_TRACE  [COMBO-JUMPER_2_NC_TRACE]  124.21,190.25 0 bottom
MMC_INT  JUMPER-SMT_3_1-NC_TRACE_SILK  [SMT-JUMPER_3_1-NC_TRACE_SILK]  44.96,61.72 0 bottom
MMC_INT1  JUMPER-SMT_3_1-NC_TRACE_SILK  [SMT-JUMPER_3_1-NC_TRACE_SILK]  108.97,61.72 0 bottom
MMC_INT2  JUMPER-SMT_3_1-NC_TRACE_SILK  [SMT-JUMPER_3_1-NC_TRACE_SILK]  44.96,133.6 0 bottom
MMC_INT3  JUMPER-SMT_3_1-NC_TRACE_SILK  [SMT-JUMPER_3_1-NC_TRACE_SILK]  108.97,133.6 0 bottom
MMC_INT4  JUMPER-SMT_3_1-NC_TRACE_SILK  [SMT-JUMPER_3_1-NC_TRACE_SILK]  44.96,205.49 0 bottom
MMC_INT5  JUMPER-SMT_3_1-NC_TRACE_SILK  [SMT-JUMPER_3_1-NC_TRACE_SILK]  108.97,205.49 0 bottom
NAU_CAP  JUMPER-SMT_2_NC_TRACE_SILK  [SMT-JUMPER_2_NC_TRACE_SILK]  22.1,32.51 0 bottom
NAU_CAP1  JUMPER-SMT_2_NC_TRACE_SILK  [SMT-JUMPER_2_NC_TRACE_SILK]  86.11,32.51 0 bottom
NAU_CAP2  JUMPER-SMT_2_NC_TRACE_SILK  [SMT-JUMPER_2_NC_TRACE_SILK]  22.1,104.39 0 bottom
NAU_CAP3  JUMPER-SMT_2_NC_TRACE_SILK  [SMT-JUMPER_2_NC_TRACE_SILK]  86.11,104.39 0 bottom
NAU_CAP4  JUMPER-SMT_2_NC_TRACE_SILK  [SMT-JUMPER_2_NC_TRACE_SILK]  22.1,176.28 0 bottom
NAU_CAP5  JUMPER-SMT_2_NC_TRACE_SILK  [SMT-JUMPER_2_NC_TRACE_SILK]  86.11,176.28 0 bottom
NAU_INT  JUMPER-SMT_3_1-NC_TRACE_SILK  [SMT-JUMPER_3_1-NC_TRACE_SILK]  44.96,64.26 0 bottom
NAU_INT1  JUMPER-SMT_3_1-NC_TRACE_SILK  [SMT-JUMPER_3_1-NC_TRACE_SILK]  108.97,64.26 0 bottom
NAU_INT2  JUMPER-SMT_3_1-NC_TRACE_SILK  [SMT-JUMPER_3_1-NC_TRACE_SILK]  44.96,136.14 0 bottom
NAU_INT3  JUMPER-SMT_3_1-NC_TRACE_SILK  [SMT-JUMPER_3_1-NC_TRACE_SILK]  108.97,136.14 0 bottom
NAU_INT4  JUMPER-SMT_3_1-NC_TRACE_SILK  [SMT-JUMPER_3_1-NC_TRACE_SILK]  44.96,208.03 0 bottom
NAU_INT5  JUMPER-SMT_3_1-NC_TRACE_SILK  [SMT-JUMPER_3_1-NC_TRACE_SILK]  108.97,208.03 0 bottom
PWR  JUMPER-SMT_2_NC_TRACE_SILK  [SMT-JUMPER_2_NC_TRACE_SILK]  51.31,46.48 90 bottom
PWR1  JUMPER-SMT_2_NC_TRACE_SILK  [SMT-JUMPER_2_NC_TRACE_SILK]  115.32,46.48 90 bottom
PWR2  JUMPER-SMT_2_NC_TRACE_SILK  [SMT-JUMPER_2_NC_TRACE_SILK]  51.31,118.36 90 bottom
PWR3  JUMPER-SMT_2_NC_TRACE_SILK  [SMT-JUMPER_2_NC_TRACE_SILK]  115.32,118.36 90 bottom
PWR4  JUMPER-SMT_2_NC_TRACE_SILK  [SMT-JUMPER_2_NC_TRACE_SILK]  51.31,190.25 90 bottom
PWR5  JUMPER-SMT_2_NC_TRACE_SILK  [SMT-JUMPER_2_NC_TRACE_SILK]  115.32,190.25 90 bottom
Q1  20V/4.2A/52mΩ/1.4W  [SOT23-3]  60.2,51.56 0 top
Q2  20V/0.2A/8MHz/1.2Ω/1Vth  [SOT-416FL]  33.53,35.05 180 top
Q3  20V/0.2A/8MHz/1.2Ω/1Vth  [SOT-416FL]  33.53,31.24 180 top
Q4  20V/0.2A/8MHz/1.2Ω/1Vth  [SOT-416FL]  43.69,32.51 0 top
Q5  20V/4.2A/52mΩ/1.4W  [SOT23-3]  43.69,38.86 0 top
Q6  [SC70-6]  51.94,64.9 90 top
Q7  20V/4.2A/52mΩ/1.4W  [SOT23-3]  46.86,29.34 0 top
Q8  20V/0.2A/8MHz/1.2Ω/1Vth  [SOT-416FL]  32.26,43.56 180 top
Q9  20V/0.2A/8MHz/1.2Ω/1Vth  [SOT-416FL]  32.26,39.5 180 top
Q10  20V/4.2A/52mΩ/1.4W  [SOT23-3]  56.01,59.18 0 top
Q11  20V/0.2A/8MHz/1.2Ω/1Vth  [SOT-416FL]  56.01,54.36 180 top
Q12  20V/4.2A/52mΩ/1.4W  [SOT23-3]  124.21,51.56 0 top
Q13  20V/0.2A/8MHz/1.2Ω/1Vth  [SOT-416FL]  97.54,35.05 180 top
Q14  20V/0.2A/8MHz/1.2Ω/1Vth  [SOT-416FL]  97.54,31.24 180 top
Q15  20V/0.2A/8MHz/1.2Ω/1Vth  [SOT-416FL]  107.7,32.51 0 top
Q16  [SC70-6]  115.95,64.9 90 top
Q17  20V/4.2A/52mΩ/1.4W  [SOT23-3]  107.7,38.86 0 top
Q18  20V/4.2A/52mΩ/1.4W  [SOT23-3]  110.87,29.34 0 top
Q19  20V/0.2A/8MHz/1.2Ω/1Vth  [SOT-416FL]  96.27,43.56 180 top
Q20  20V/0.2A/8MHz/1.2Ω/1Vth  [SOT-416FL]  96.27,39.5 180 top
Q21  20V/4.2A/52mΩ/1.4W  [SOT23-3]  120.02,59.18 0 top
Q22  20V/0.2A/8MHz/1.2Ω/1Vth  [SOT-416FL]  120.02,54.36 180 top
Q23  20V/4.2A/52mΩ/1.4W  [SOT23-3]  60.2,123.44 0 top
Q24  20V/0.2A/8MHz/1.2Ω/1Vth  [SOT-416FL]  33.53,106.93 180 top
Q25  20V/0.2A/8MHz/1.2Ω/1Vth  [SOT-416FL]  33.53,103.12 180 top
Q26  20V/0.2A/8MHz/1.2Ω/1Vth  [SOT-416FL]  43.69,104.39 0 top
Q27  [SC70-6]  51.94,136.78 90 top
Q28  20V/4.2A/52mΩ/1.4W  [SOT23-3]  43.69,110.74 0 top
Q29  20V/4.2A/52mΩ/1.4W  [SOT23-3]  46.86,101.22 0 top
Q30  20V/0.2A/8MHz/1.2Ω/1Vth  [SOT-416FL]  32.26,115.44 180 top
Q31  20V/0.2A/8MHz/1.2Ω/1Vth  [SOT-416FL]  32.26,111.38 180 top
Q32  20V/4.2A/52mΩ/1.4W  [SOT23-3]  56.01,131.06 0 top
Q33  20V/0.2A/8MHz/1.2Ω/1Vth  [SOT-416FL]  56.01,126.24 180 top
Q34  20V/4.2A/52mΩ/1.4W  [SOT23-3]  124.21,123.44 0 top
Q35  20V/0.2A/8MHz/1.2Ω/1Vth  [SOT-416FL]  97.54,106.93 180 top
Q36  20V/0.2A/8MHz/1.2Ω/1Vth  [SOT-416FL]  97.54,103.12 180 top
Q37  20V/0.2A/8MHz/1.2Ω/1Vth  [SOT-416FL]  107.7,104.39 0 top
Q38  [SC70-6]  115.95,136.78 90 top
Q39  20V/4.2A/52mΩ/1.4W  [SOT23-3]  107.7,110.74 0 top
Q40  20V/4.2A/52mΩ/1.4W  [SOT23-3]  110.87,101.22 0 top
Q41  20V/0.2A/8MHz/1.2Ω/1Vth  [SOT-416FL]  96.27,115.44 180 top
Q42  20V/0.2A/8MHz/1.2Ω/1Vth  [SOT-416FL]  96.27,111.38 180 top
Q43  20V/4.2A/52mΩ/1.4W  [SOT23-3]  120.02,131.06 0 top
Q44  20V/0.2A/8MHz/1.2Ω/1Vth  [SOT-416FL]  120.02,126.24 180 top
Q45  20V/4.2A/52mΩ/1.4W  [SOT23-3]  60.2,195.33 0 top
Q46  20V/0.2A/8MHz/1.2Ω/1Vth  [SOT-416FL]  33.53,178.82 180 top
Q47  20V/0.2A/8MHz/1.2Ω/1Vth  [SOT-416FL]  33.53,175.01 180 top
Q48  20V/0.2A/8MHz/1.2Ω/1Vth  [SOT-416FL]  43.69,176.28 0 top
Q49  [SC70-6]  51.94,208.66 90 top
Q50  20V/4.2A/52mΩ/1.4W  [SOT23-3]  43.69,182.63 0 top
Q51  20V/4.2A/52mΩ/1.4W  [SOT23-3]  46.86,173.1 0 top
Q52  20V/0.2A/8MHz/1.2Ω/1Vth  [SOT-416FL]  32.26,187.32 180 top
Q53  20V/0.2A/8MHz/1.2Ω/1Vth  [SOT-416FL]  32.26,183.26 180 top
Q54  20V/4.2A/52mΩ/1.4W  [SOT23-3]  56.01,202.95 0 top
Q55  20V/0.2A/8MHz/1.2Ω/1Vth  [SOT-416FL]  56.01,198.12 180 top
Q56  20V/4.2A/52mΩ/1.4W  [SOT23-3]  124.21,195.33 0 top
Q57  20V/0.2A/8MHz/1.2Ω/1Vth  [SOT-416FL]  97.54,178.82 180 top
Q58  20V/0.2A/8MHz/1.2Ω/1Vth  [SOT-416FL]  97.54,175.01 180 top
Q59  20V/0.2A/8MHz/1.2Ω/1Vth  [SOT-416FL]  107.7,176.28 0 top
Q60  [SC70-6]  115.95,208.66 90 top
Q61  20V/4.2A/52mΩ/1.4W  [SOT23-3]  107.7,182.63 0 top
Q62  20V/4.2A/52mΩ/1.4W  [SOT23-3]  110.87,173.1 0 top
Q63  20V/0.2A/8MHz/1.2Ω/1Vth  [SOT-416FL]  96.27,187.32 180 top
Q64  20V/0.2A/8MHz/1.2Ω/1Vth  [SOT-416FL]  96.27,183.26 180 top
Q65  20V/4.2A/52mΩ/1.4W  [SOT23-3]  120.02,202.95 0 top
Q66  20V/0.2A/8MHz/1.2Ω/1Vth  [SOT-416FL]  120.02,198.12 180 top
R1  5.1k  [0603]  62.74,76.96 0 top
R2  5.1k  [0603]  62.74,75.06 0 top
R3  100k  [0603]  56.39,49.02 0 top
R4  100k  [0603]  56.39,46.48 270 top
R5  453k  [0603]  53.85,42.67 270 top
R6  100k  [0603]  53.85,46.48 270 top
R7  4.7k  [0603]  64.01,46.48 90 top
R8  2.2k  [0603]  64.01,50.29 90 top
R9  100k  [0603]  56.39,50.93 180 top
R10  DNP  [0603]  51.31,46.48 270 top
R11  2.2k  [0603]  62.74,29.97 270 top
R12  2.2k  [0603]  60.2,29.97 270 top
R13  100k  [0603]  10.67,30.61 180 top
R14  100k  [0603]  37.59,29.97 270 top
R15  2.2k  [0603]  33.53,37.59 0 top
R16  2.2k  [0603]  33.53,33.78 0 top
R17  100k  [0603]  43.69,36.32 0 top
R18  100k  [0603]  43.69,33.78 180 top
R19  10k  [0603]  51.94,67.44 0 top
R20  10k  [0603]  51.94,69.34 180 top
R21  DNP  [0603]  34.16,49.02 90 top
R22  47  [0603]  18.29,29.34 180 top
R23  47  [0603]  22.1,29.34 0 top
R24  2.2k  [0603]  46.23,47.75 0 top
R25  100k  [0603]  56.39,52.83 0 top
R26  100k  [0603]  27.18,68.07 90 top
R27  100k  [0603]  46.86,31.88 0 top
R28  100k  [0603]  46.23,45.21 0 top
R29  2.2k  [0603]  32.26,46.1 0 top
R30  2.2k  [0603]  32.26,42.04 0 top
R31  100k  [0603]  56.01,56.77 0 top
R32  5.1k  [0603]  126.75,76.96 0 top
R33  5.1k  [0603]  126.75,75.06 0 top
R34  100k  [0603]  120.4,49.02 0 top
R35  100k  [0603]  120.4,46.48 270 top
R36  453k  [0603]  117.86,42.67 270 top
R37  100k  [0603]  117.86,46.48 270 top
R38  4.7k  [0603]  128.02,46.48 90 top
R39  2.2k  [0603]  128.02,50.29 90 top
R40  DNP  [0603]  115.32,46.48 270 top
R41  2.2k  [0603]  126.75,29.97 270 top
R42  2.2k  [0603]  124.21,29.97 270 top
R43  100k  [0603]  74.68,30.61 180 top
R44  100k  [0603]  101.6,29.97 270 top
R45  2.2k  [0603]  97.54,37.59 0 top
R46  2.2k  [0603]  97.54,33.78 0 top
R47  100k  [0603]  107.7,36.32 0 top
R48  100k  [0603]  107.7,33.78 180 top
R49  DNP  [0603]  98.17,49.02 90 top
R50  47  [0603]  82.3,29.34 180 top
R51  47  [0603]  86.11,29.34 0 top
R52  10k  [0603]  115.95,67.44 0 top
R53  10k  [0603]  115.95,69.34 180 top
R54  2.2k  [0603]  110.24,47.75 0 top
R55  100k  [0603]  120.4,50.93 180 top
R56  100k  [0603]  120.4,52.83 0 top
R57  100k  [0603]  91.19,68.07 90 top
R58  100k  [0603]  110.87,31.88 0 top
R59  2.2k  [0603]  96.27,46.1 0 top
R60  2.2k  [0603]  96.27,42.04 0 top
R61  100k  [0603]  110.24,45.21 0 top
R62  100k  [0603]  120.02,56.77 0 top
R63  5.1k  [0603]  62.74,148.84 0 top
R64  5.1k  [0603]  62.74,146.94 0 top
R65  100k  [0603]  56.39,120.9 0 top
R66  100k  [0603]  56.39,118.36 270 top
R67  453k  [0603]  53.85,114.55 270 top
R68  100k  [0603]  53.85,118.36 270 top
R69  4.7k  [0603]  64.01,118.36 90 top
R70  2.2k  [0603]  64.01,122.17 90 top
R71  DNP  [0603]  51.31,118.36 270 top
R72  2.2k  [0603]  62.74,101.85 270 top
R73  2.2k  [0603]  60.2,101.85 270 top
R74  100k  [0603]  10.67,102.49 180 top
R75  100k  [0603]  37.59,101.85 270 top
R76  2.2k  [0603]  33.53,109.47 0 top
R77  2.2k  [0603]  33.53,105.66 0 top
R78  100k  [0603]  43.69,108.2 0 top
R79  100k  [0603]  43.69,105.66 180 top
R80  DNP  [0603]  34.16,120.9 90 top
R81  47  [0603]  18.29,101.22 180 top
R82  47  [0603]  22.1,101.22 0 top
R83  10k  [0603]  51.94,139.32 0 top
R84  10k  [0603]  51.94,141.22 180 top
R85  2.2k  [0603]  46.23,119.63 0 top
R86  100k  [0603]  56.39,122.81 180 top
R87  100k  [0603]  56.39,124.71 0 top
R88  100k  [0603]  27.18,139.95 90 top
R89  100k  [0603]  46.86,103.76 0 top
R90  2.2k  [0603]  32.26,117.98 0 top
R91  2.2k  [0603]  32.26,113.92 0 top
R92  100k  [0603]  46.23,117.09 0 top
R93  100k  [0603]  56.01,128.65 0 top
R94  5.1k  [0603]  126.75,148.84 0 top
R95  5.1k  [0603]  126.75,146.94 0 top
R96  100k  [0603]  120.4,120.9 0 top
R97  100k  [0603]  120.4,118.36 270 top
R98  453k  [0603]  117.86,114.55 270 top
R99  100k  [0603]  117.86,118.36 270 top
R100  4.7k  [0603]  128.02,118.36 90 top
R101  2.2k  [0603]  128.02,122.17 90 top
R102  DNP  [0603]  115.32,118.36 270 top
R103  2.2k  [0603]  126.75,101.85 270 top
R104  2.2k  [0603]  124.21,101.85 270 top
R105  100k  [0603]  74.68,102.49 180 top
R106  100k  [0603]  101.6,101.85 270 top
R107  2.2k  [0603]  97.54,109.47 0 top
R108  2.2k  [0603]  97.54,105.66 0 top
R109  100k  [0603]  107.7,108.2 0 top
R110  100k  [0603]  107.7,105.66 180 top
R111  DNP  [0603]  98.17,120.9 90 top
R112  47  [0603]  82.3,101.22 180 top
R113  47  [0603]  86.11,101.22 0 top
R114  10k  [0603]  115.95,139.32 0 top
R115  10k  [0603]  115.95,141.22 180 top
R116  2.2k  [0603]  110.24,119.63 0 top
R117  100k  [0603]  120.4,122.81 180 top
R118  100k  [0603]  120.4,124.71 0 top
R119  100k  [0603]  91.19,139.95 90 top
R120  100k  [0603]  110.87,103.76 0 top
R121  2.2k  [0603]  96.27,117.98 0 top
R122  2.2k  [0603]  96.27,113.92 0 top
R123  100k  [0603]  110.24,117.09 0 top
R124  100k  [0603]  120.02,128.65 0 top
R125  5.1k  [0603]  62.74,220.73 0 top
R126  5.1k  [0603]  62.74,218.82 0 top
R127  100k  [0603]  56.39,192.79 0 top
R128  100k  [0603]  56.39,190.25 270 top
R129  453k  [0603]  53.85,186.44 270 top
R130  100k  [0603]  53.85,190.25 270 top
R131  4.7k  [0603]  64.01,190.25 90 top
R132  2.2k  [0603]  64.01,194.06 90 top
R133  DNP  [0603]  51.31,190.25 270 top
R134  2.2k  [0603]  62.74,173.74 270 top
R135  2.2k  [0603]  60.2,173.74 270 top
R136  100k  [0603]  10.67,174.37 180 top
R137  100k  [0603]  37.59,173.74 270 top
R138  2.2k  [0603]  33.53,181.36 0 top
R139  2.2k  [0603]  33.53,177.55 0 top
R140  100k  [0603]  43.69,180.09 0 top
R141  100k  [0603]  43.69,177.55 180 top
R142  DNP  [0603]  34.16,192.79 90 top
R143  47  [0603]  18.29,173.1 180 top
R144  47  [0603]  22.1,173.1 0 top
R145  10k  [0603]  51.94,211.2 0 top
R146  10k  [0603]  51.94,213.11 180 top
R147  2.2k  [0603]  46.23,191.52 0 top
R148  100k  [0603]  56.39,194.69 180 top
R149  100k  [0603]  56.39,196.6 0 top
R150  100k  [0603]  27.18,211.84 90 top
R151  100k  [0603]  46.86,175.64 0 top
R152  2.2k  [0603]  32.26,189.87 0 top
R153  2.2k  [0603]  32.26,185.8 0 top
R154  100k  [0603]  46.23,188.98 0 top
R155  100k  [0603]  56.01,200.53 0 top
R156  5.1k  [0603]  126.75,220.73 0 top
R157  5.1k  [0603]  126.75,218.82 0 top
R158  100k  [0603]  120.4,192.79 0 top
R159  100k  [0603]  120.4,190.25 270 top
R160  453k  [0603]  117.86,186.44 270 top
R161  100k  [0603]  117.86,190.25 270 top
R162  4.7k  [0603]  128.02,190.25 90 top
R163  2.2k  [0603]  128.02,194.06 90 top
R164  DNP  [0603]  115.32,190.25 270 top
R165  2.2k  [0603]  126.75,173.74 270 top
R166  2.2k  [0603]  124.21,173.74 270 top
R167  100k  [0603]  74.68,174.37 180 top
R168  100k  [0603]  101.6,173.74 270 top
R169  2.2k  [0603]  97.54,181.36 0 top
R170  2.2k  [0603]  97.54,177.55 0 top
R171  100k  [0603]  107.7,180.09 0 top
R172  100k  [0603]  107.7,177.55 180 top
R173  DNP  [0603]  98.17,192.79 90 top
R174  47  [0603]  82.3,173.1 180 top
R175  47  [0603]  86.11,173.1 0 top
R176  10k  [0603]  115.95,211.2 0 top
R177  10k  [0603]  115.95,213.11 180 top
R178  2.2k  [0603]  110.24,191.52 0 top
R179  100k  [0603]  120.4,194.69 180 top
R180  100k  [0603]  120.4,196.6 0 top
R181  100k  [0603]  91.19,211.84 90 top
R182  100k  [0603]  110.87,175.64 0 top
R183  2.2k  [0603]  96.27,189.87 0 top
R184  2.2k  [0603]  96.27,185.8 0 top
R185  100k  [0603]  110.24,188.98 0 top
R186  100k  [0603]  120.02,200.53 0 top
RESET  MOMENTARY-SWITCH-SPST-SMD-4.6X2.8MM  [TACTILE_SWITCH_SMD_4.6X2.8MM]  52.58,57.91 90 top
RESET1  MOMENTARY-SWITCH-SPST-SMD-4.6X2.8MM  [TACTILE_SWITCH_SMD_4.6X2.8MM]  116.59,57.91 90 top
RESET2  MOMENTARY-SWITCH-SPST-SMD-4.6X2.8MM  [TACTILE_SWITCH_SMD_4.6X2.8MM]  52.58,129.79 90 top
RESET3  MOMENTARY-SWITCH-SPST-SMD-4.6X2.8MM  [TACTILE_SWITCH_SMD_4.6X2.8MM]  116.59,129.79 90 top
RESET4  MOMENTARY-SWITCH-SPST-SMD-4.6X2.8MM  [TACTILE_SWITCH_SMD_4.6X2.8MM]  52.58,201.68 90 top
RESET5  MOMENTARY-SWITCH-SPST-SMD-4.6X2.8MM  [TACTILE_SWITCH_SMD_4.6X2.8MM]  116.59,201.68 90 top
SHLD  JUMPER-SMT_2_NC_TRACE_SILK  [SMT-JUMPER_2_NC_TRACE_SILK]  68.71,66.8 0 bottom
SHLD1  JUMPER-SMT_2_NC_TRACE_SILK  [SMT-JUMPER_2_NC_TRACE_SILK]  132.72,66.8 0 bottom
SHLD2  JUMPER-SMT_2_NC_TRACE_SILK  [SMT-JUMPER_2_NC_TRACE_SILK]  68.71,138.68 0 bottom
SHLD3  JUMPER-SMT_2_NC_TRACE_SILK  [SMT-JUMPER_2_NC_TRACE_SILK]  132.72,138.68 0 bottom
SHLD4  JUMPER-SMT_2_NC_TRACE_SILK  [SMT-JUMPER_2_NC_TRACE_SILK]  68.71,210.57 0 bottom
SHLD5  JUMPER-SMT_2_NC_TRACE_SILK  [SMT-JUMPER_2_NC_TRACE_SILK]  132.72,210.57 0 bottom
TP1  TEST-POINT3X4  [PAD.03X.04]  38.61,38.86 0 bottom
TP2  TEST-POINT3X4  [PAD.03X.04]  102.62,38.86 0 bottom
TP3  TEST-POINT3X4  [PAD.03X.04]  38.61,110.74 0 bottom
TP4  TEST-POINT3X4  [PAD.03X.04]  102.62,110.74 0 bottom
TP5  TEST-POINT3X4  [PAD.03X.04]  38.61,182.63 0 bottom
TP6  TEST-POINT3X4  [PAD.03X.04]  102.62,182.63 0 bottom
U1  ESP-WROOM-3232D  [ESP-WROOM-32D]  38.61,64.26 90 top
U2  AP3429A  [SOT23-5]  58.93,42.67 0 top
U3  MCP73831  [SOT23-5]  66.55,49.66 0 top
U4  ESP-WROOM-3232D  [ESP-WROOM-32D]  102.62,64.26 90 top
U5  BME680  [LGA3.0X3.0]  10.67,25.53 90 top
U6  9DoF IMU  [QFN24-3X3-ICM-20948]  38.61,35.05 0 top
U7  1.8V/100mA  [SC70]  38.61,40.13 90 top
U8  CH340C  [SO016]  57.66,66.8 90 top
U9  DNP  [LGA-14L]  38.61,49.02 90 top
U10  DNP  [LGA-16-3X3MM-4X4PINS]  38.61,43.94 90 top
U11  RFM9XRFM95  [RFM95]  17.02,62.99 180 top
U12  NAU7802SOIC  [SO16]  22.1,36.32 0 top
U13  AP3429A  [SOT23-5]  122.94,42.67 0 top
U14  MCP73831  [SOT23-5]  130.56,49.66 0 top
U15  BME680  [LGA3.0X3.0]  74.68,25.53 90 top
U16  9DoF IMU  [QFN24-3X3-ICM-20948]  102.62,35.05 0 top
U17  1.8V/100mA  [SC70]  102.62,40.13 90 top
U18  CH340C  [SO016]  121.67,66.8 90 top
U19  DNP  [LGA-14L]  102.62,49.02 90 top
U20  DNP  [LGA-16-3X3MM-4X4PINS]  102.62,43.94 90 top
U21  RFM9XRFM95  [RFM95]  81.03,62.99 180 top
U22  NAU7802SOIC  [SO16]  86.11,36.32 0 top
U23  ESP-WROOM-3232D  [ESP-WROOM-32D]  38.61,136.14 90 top
U24  AP3429A  [SOT23-5]  58.93,114.55 0 top
U25  MCP73831  [SOT23-5]  66.55,121.54 0 top
U26  BME680  [LGA3.0X3.0]  10.67,97.41 90 top
U27  9DoF IMU  [QFN24-3X3-ICM-20948]  38.61,106.93 0 top
U28  1.8V/100mA  [SC70]  38.61,112.01 90 top
U29  CH340C  [SO016]  57.66,138.68 90 top
U30  DNP  [LGA-14L]  38.61,120.9 90 top
U31  DNP  [LGA-16-3X3MM-4X4PINS]  38.61,115.82 90 top
U32  RFM9XRFM95  [RFM95]  17.02,134.87 180 top
U33  NAU7802SOIC  [SO16]  22.1,108.2 0 top
U34  ESP-WROOM-3232D  [ESP-WROOM-32D]  102.62,136.14 90 top
U35  AP3429A  [SOT23-5]  122.94,114.55 0 top
U36  MCP73831  [SOT23-5]  130.56,121.54 0 top
U37  BME680  [LGA3.0X3.0]  74.68,97.41 90 top
U38  9DoF IMU  [QFN24-3X3-ICM-20948]  102.62,106.93 0 top
U39  1.8V/100mA  [SC70]  102.62,112.01 90 top
U40  CH340C  [SO016]  121.67,138.68 90 top
U41  DNP  [LGA-14L]  102.62,120.9 90 top
U42  DNP  [LGA-16-3X3MM-4X4PINS]  102.62,115.82 90 top
U43  RFM9XRFM95  [RFM95]  81.03,134.87 180 top
U44  NAU7802SOIC  [SO16]  86.11,108.2 0 top
U45  ESP-WROOM-3232D  [ESP-WROOM-32D]  38.61,208.03 90 top
U46  AP3429A  [SOT23-5]  58.93,186.44 0 top
U47  MCP73831  [SOT23-5]  66.55,193.42 0 top
U48  BME680  [LGA3.0X3.0]  10.67,169.29 90 top
U49  9DoF IMU  [QFN24-3X3-ICM-20948]  38.61,178.82 0 top
U50  1.8V/100mA  [SC70]  38.61,183.9 90 top
U51  CH340C  [SO016]  57.66,210.57 90 top
U52  DNP  [LGA-14L]  38.61,192.79 90 top
U53  DNP  [LGA-16-3X3MM-4X4PINS]  38.61,187.71 90 top
U54  RFM9XRFM95  [RFM95]  17.02,206.76 180 top
U55  NAU7802SOIC  [SO16]  22.1,180.09 0 top
U56  ESP-WROOM-3232D  [ESP-WROOM-32D]  102.62,208.03 90 top
U57  AP3429A  [SOT23-5]  122.94,186.44 0 top
U58  MCP73831  [SOT23-5]  130.56,193.42 0 top
U59  BME680  [LGA3.0X3.0]  74.68,169.29 90 top
U60  9DoF IMU  [QFN24-3X3-ICM-20948]  102.62,178.82 0 top
U61  1.8V/100mA  [SC70]  102.62,183.9 90 top
U62  CH340C  [SO016]  121.67,210.57 90 top
U63  DNP  [LGA-14L]  102.62,192.79 90 top
U64  DNP  [LGA-16-3X3MM-4X4PINS]  102.62,187.71 90 top
U65  RFM9XRFM95  [RFM95]  81.03,206.76 180 top
U66  NAU7802SOIC  [SO16]  86.11,180.09 0 top
U$1  [WATERSHED0]  116.59,75.69 0 top
U$2  [WATERSHED0]  52.58,75.69 0 top
U$3  [MONITOR0]  52.58,74.42 0 top
U$4  [GND0]  36.7,15.88 0 bottom
U$5  [#IO17#0]  46.35,54.1 0 bottom
U$6  [#GND_#0]  69.09,21.08 0 top
U$7  [#_GND#0]  69.09,21.08 0 bottom
U$8  [GND0]  53.21,15.88 0 bottom
U$9  [#MEAS#0]  60.2,48.13 0 bottom
U$10  [3V30]  57.02,15.88 0 bottom
U$11  [GND0]  20.19,15.88 0 bottom
U$12  [A#0]  24,20.45 0 bottom
U$13  [VDD0]  24,15.88 0 bottom
U$14  [#CHG#0]  66.55,48.13 0 bottom
U$15  [#I2C#0]  61.47,31.62 0 bottom
U$16  [CHG0]  66.55,45.21 0 top
U$17  [#CAP#0]  22.1,34.16 0 bottom
U$18  [#BME_ADR#0]  10.67,26.29 90 bottom
U$19  [#ICM_ADR#0]  38.61,32.89 0 bottom
U$20  [#ISM_ADR#0]  34.16,50.8 0 bottom
U$21  [#BATTERY#0]  60.83,56.64 90 bottom
U$22  [#SHLD#0]  67.82,66.8 0 bottom
U$23  [I360]  16.38,50.93 0 top
U$24  [3V30]  40.51,15.88 0 bottom
U$25  [VO0]  40.51,17.4 0 bottom
U$26  [VOUT0]  16.38,47.12 0 top
U$27  [RESET0]  50.04,57.91 90 top
U$28  [BOOT0]  50.04,51.56 90 top
U$29  [PWR0]  50.04,42.67 90 top
U$30  [STAT0]  46.23,49.02 0 top
U$31  [IO20]  46.23,51.56 0 top
U$32  [ORW0]  57.02,33.53 0 bottom
U$33  [OR0]  53.21,33.53 0 bottom
U$34  [GRW0]  57.02,32 0 bottom
U$35  [GR0]  53.21,32 0 bottom
U$36  [BLW0]  57.02,30.48 0 bottom
U$37  [BL0]  53.21,30.48 0 bottom
U$38  [BRW0]  57.02,28.96 0 bottom
U$39  [BR0]  53.21,28.96 0 bottom
U$40  [A#1]  20.19,20.45 0 bottom
U$41  [B#0]  24,17.4 0 bottom
U$42  [B#1]  20.19,17.4 0 bottom
U$43  [E#0]  24,18.92 0 bottom
U$44  [E#1]  20.19,18.92 0 bottom
U$45  [#RJ45_COLORS#0]  55.12,35.05 0 bottom
U$46  [#PWR#0]  51.31,48.39 0 bottom
U$47  [#3V3_#0]  69.09,23.62 0 top
U$48  [#SDA_#0]  69.09,26.16 0 top
U$49  [MONITOR0]  116.59,74.42 0 top
U$50  [#LOAD_CELL#0]  22.1,27.94 0 top
U$51  [#GPIO_A#0]  38.61,27.94 0 top
U$52  [IO250]  36.7,20.45 0 bottom
U$53  [#GPIO_B#0]  55.12,27.94 0 top
U$54  [IO330]  36.7,17.4 0 bottom
U$55  [#LOAD_CELL#0]  22.1,21.84 0 bottom
U$56  [#SCL_#0]  69.09,28.7 0 top
U$57  [NC0]  53.21,18.92 0 bottom
U$58  [IO170]  57.02,20.45 0 bottom
U$59  [IO180]  53.21,20.45 0 bottom
U$60  [IO190]  57.02,18.92 0 bottom
U$61  [I340]  40.51,18.92 0 bottom
U$62  [I350]  40.51,20.45 0 bottom
U$63  [#MEAS#0]  124.21,48.13 0 bottom
U$64  [I390]  36.7,18.92 0 bottom
U$65  [#IO19#0]  46.35,61.72 0 bottom
U$66  [#IO18#0]  46.35,59.18 0 bottom
U$67  [#IO17#0]  46.35,56.64 0 bottom
U$68  [#IO23#0]  46.35,64.26 0 bottom
U$69  [VO0]  57.02,17.4 0 bottom
U$70  [#NAU_INT#0]  43.56,64.26 0 bottom
U$71  [#MMC_INT#0]  43.56,61.72 0 bottom
U$72  [#ISM_INT2#0]  43.56,59.18 0 bottom
U$73  [#ISM_INT1#0]  43.56,56.64 0 bottom
U$74  [#ICM_INT#0]  43.56,54.1 0 bottom
U$75  [#IO#0]  45.85,64.9 90 bottom
U$76  [##INT##0]  44.07,64.9 90 bottom
U$77  [#NOTES#0]  29.72,71.25 0 bottom
U$78  [IO230]  53.21,17.4 0 bottom
U$79  [#GND_#0]  69.09,42.67 0 top
U$80  [#_GND#0]  69.09,42.67 0 bottom
U$81  [#_SCL#1]  69.09,28.7 0 bottom
U$82  [OPEN#0]  9.4,34.42 90 bottom
U$83  [CLOSED#0]  8.13,34.42 90 bottom
U$84  [#_SDA#2]  69.09,26.16 0 bottom
U$85  [#_3V3#0]  69.09,23.62 0 bottom
U$86  [#GPIO_A#0]  38.61,21.84 0 bottom
U$87  [#GPIO_B#0]  55.12,21.84 0 bottom
U$88  [#GPS#0]  9.4,42.67 0 top
U$89  [GND3]  16.38,49.02 0 top
U$90  [#CHG#0]  130.56,48.13 0 bottom
U$91  [#I2C#0]  125.48,31.62 0 bottom
U$92  [CHG0]  130.56,45.21 0 top
U$93  [#CAP#0]  86.11,34.16 0 bottom
U$94  [X0]  12.32,45.47 0 bottom
U$95  [Y0]  8.76,45.47 0 bottom
U$96  [Z0]  9.4,47.75 0 bottom
U$97  [#BME_ADR#0]  74.68,26.29 90 bottom
U$98  [#ICM_ADR#0]  102.62,32.89 0 bottom
U$99  [#ISM_ADR#0]  98.17,50.8 0 bottom
U$100  [X0]  26.42,45.21 0 bottom
U$101  [#BATTERY#0]  124.84,56.64 90 bottom
U$102  [Y0]  24.26,44.07 0 bottom
U$103  [Z0]  24.64,47.75 0 bottom
U$104  [X0]  19.3,45.72 0 bottom
U$105  [Y0]  20.95,47.37 0 bottom
U$106  [Z0]  22.35,44.45 0 bottom
U$107  [#SHLD#0]  131.83,66.8 0 bottom
U$108  [RESET0]  114.05,57.91 90 top
U$109  [BOOT0]  114.05,51.56 90 top
U$110  [ICM0]  10.67,50.29 0 bottom